# Altium PCB PCB1.PcbDoc
Units mil, origin at the board's own origin, x right, y up, seen from the top; angles counter-clockwise.
Board outline 1500 x 1100 mil, 2 copper layers (Top Layer, Bottom Layer), stack 65.792 mil thick; 7 components, 0 nets, 12 pads, 0 vias.
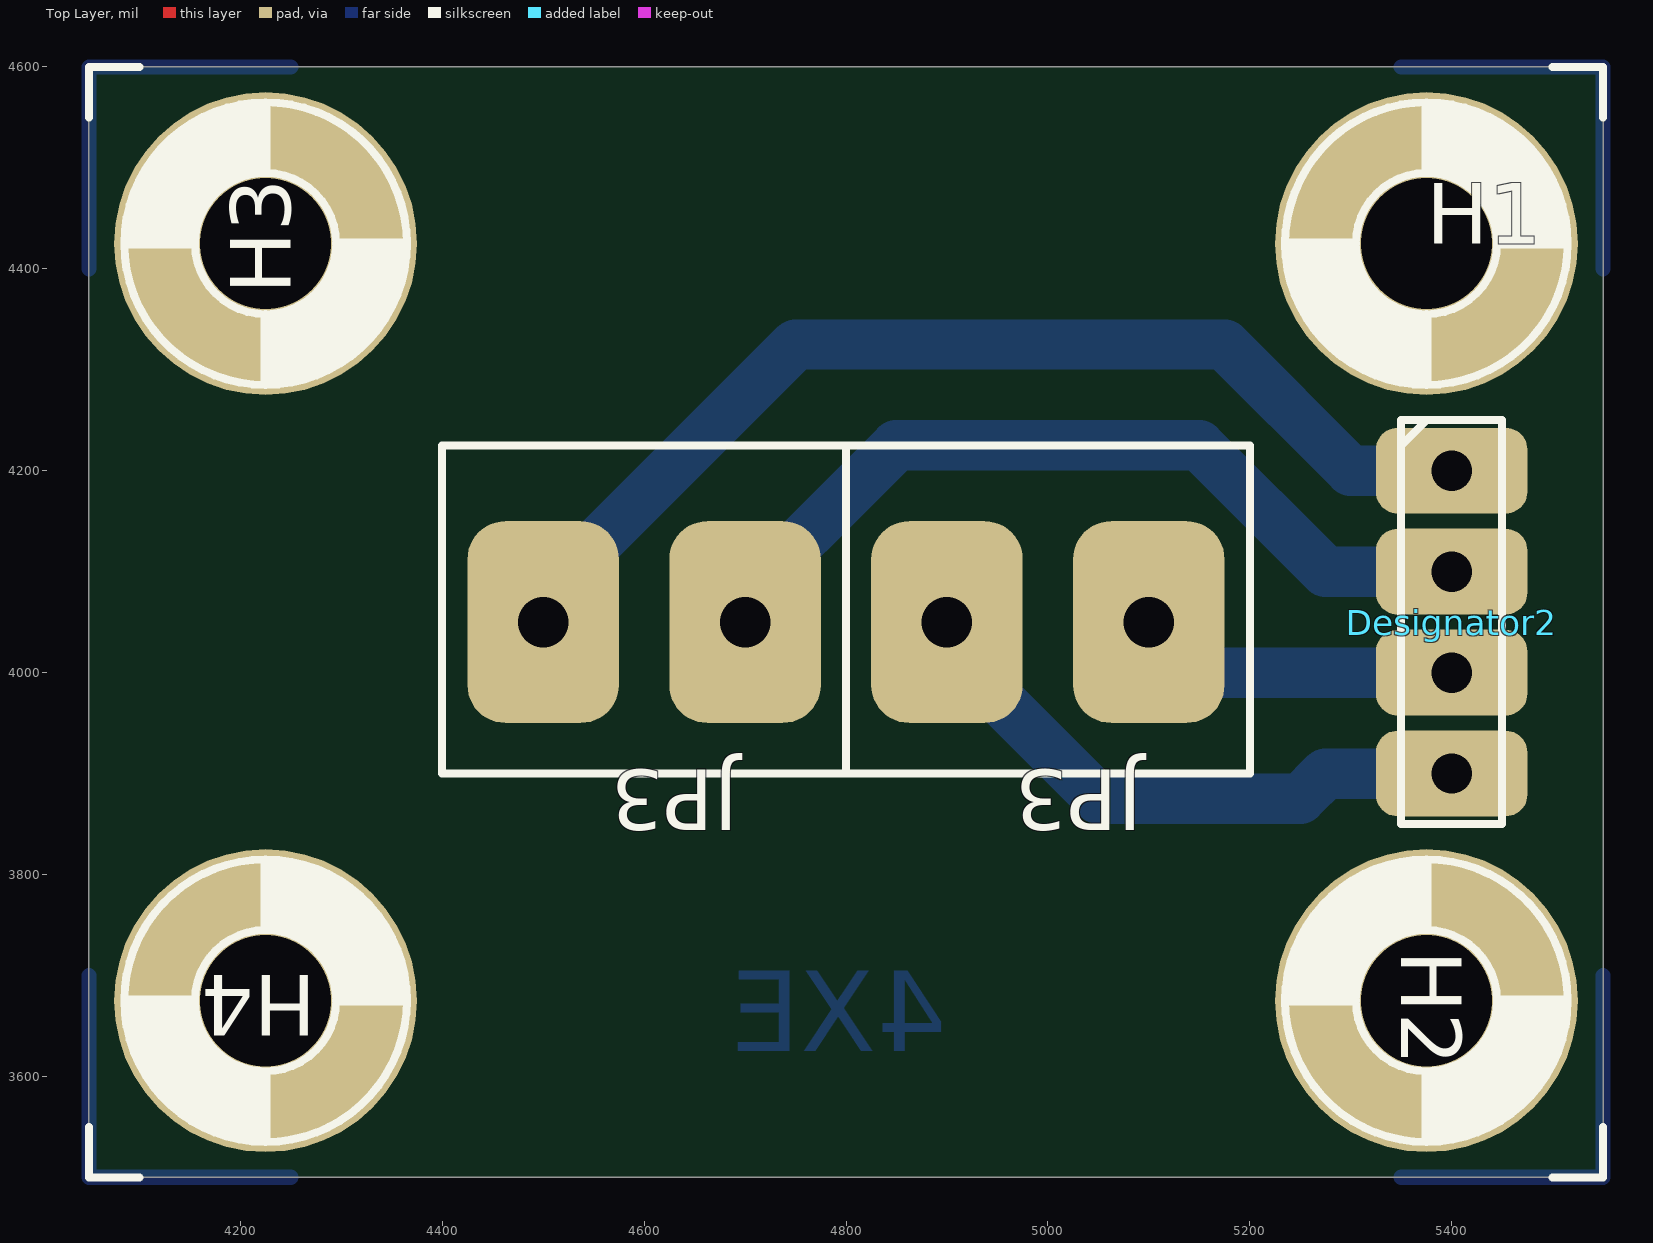
[diagram p0: Top Layer view]
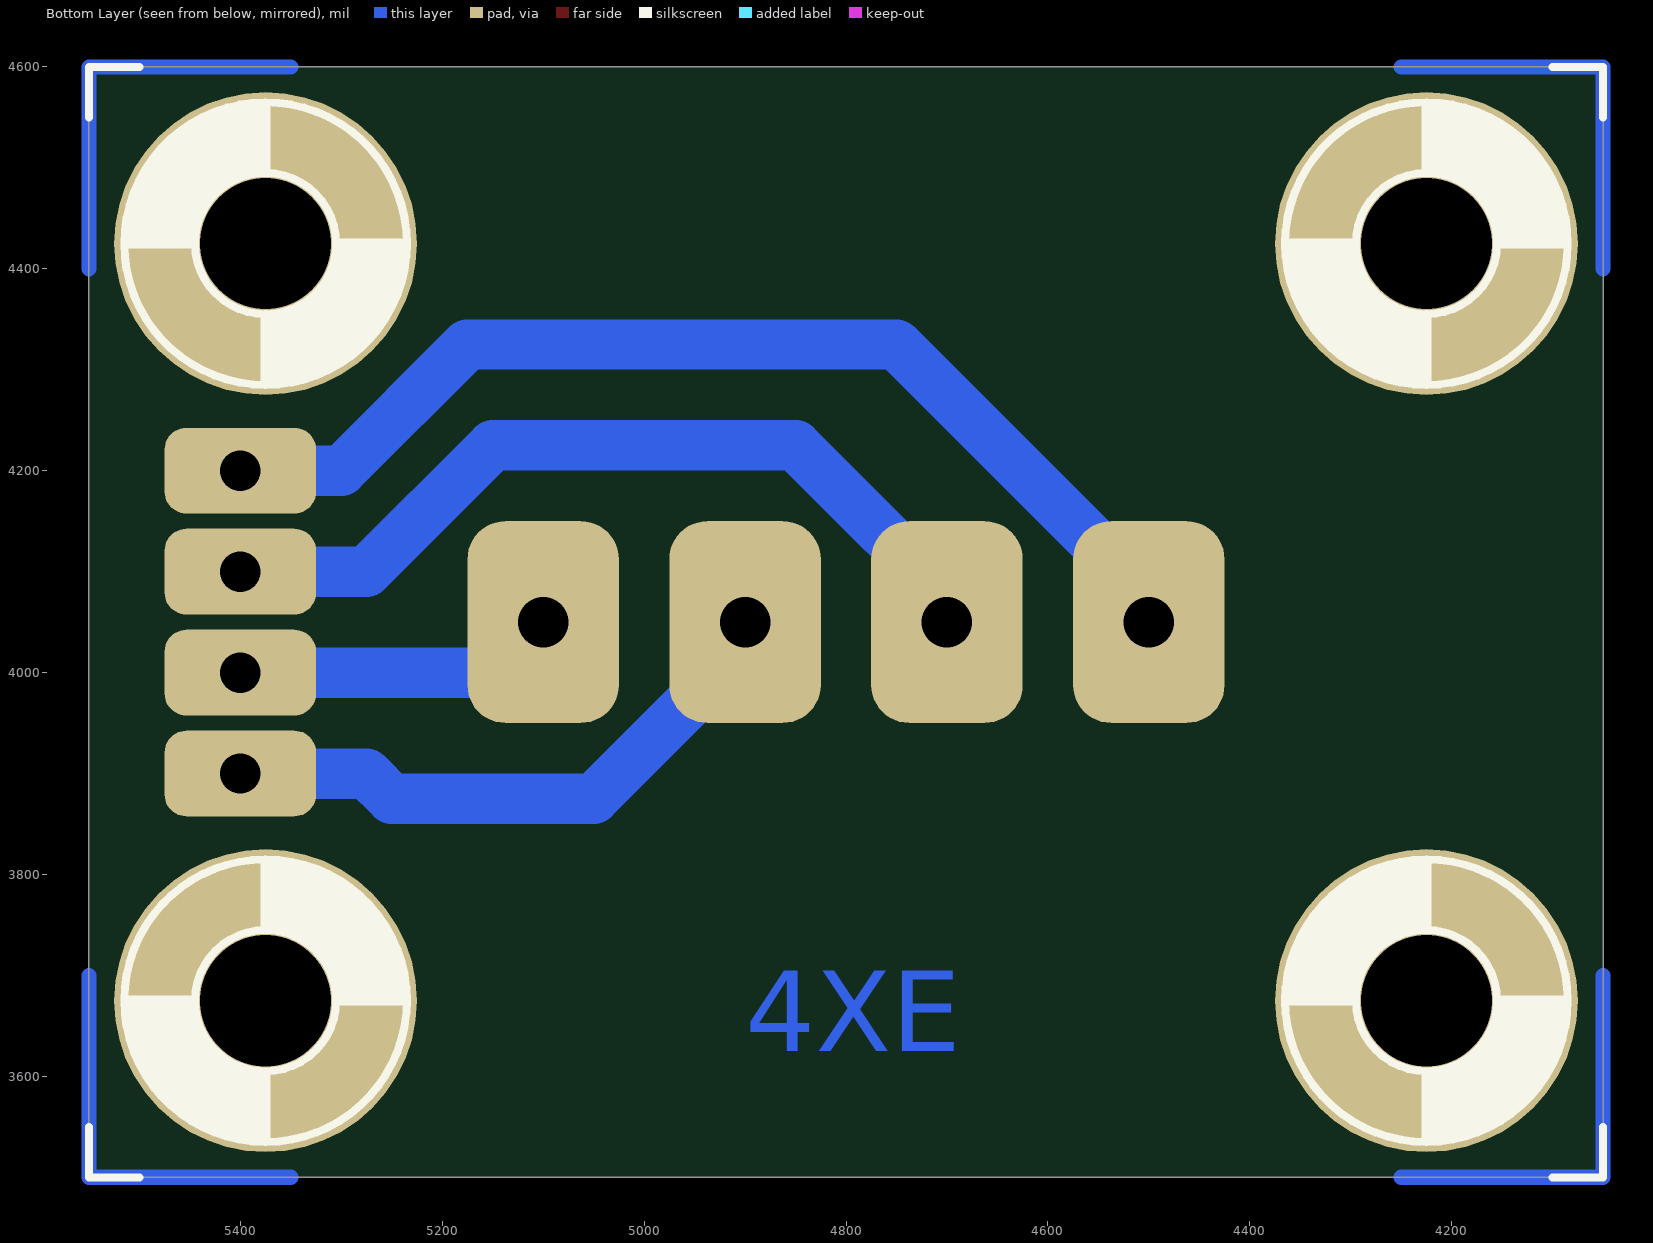
[diagram p1: Bottom Layer view, seen from below]

## Layer stack, top to bottom
Top Layer: signal copper 1.4
Dielectric: core 62.9921, FR-4, Dk 4.8
Bottom Layer: signal copper 1.4

## Board outline
5550,4600 4050,4600 4050,3500 5550,3500

## Design rules (kind name [scope] priority, off if disabled: settings)
Clearance [All] p1: gap=20
PolygonConnect [All] p1: connectstyle=Relief reliefconductorwidth=25 reliefentries=4 polygonreliefangle="90 Angle"
RoutingVias [All] p1: holewidth=28 width=50 viastyle="Through Hole" minholewidth=28 minwidth=50 maxholewidth=28 maxwidth=50
SilkscreenOverComponentPads [All] p1: minsilkscreentomaskgap=10
SolderMaskExpansion [All] p1: expansion=4
Width [All] p1: maxlimit=1000 minlimit=10 preferedwidth=20
27 further rules are at their usual default settings.

## Classes and differential pairs
component class "PCB OPTO FAST": H1 H2 H3 H4 JP3

## Components (designator, comment, footprint, x,y, rotation, side; value= is the part's Value field where it differs from the comment)
Designator2 "Comment" HDR4x1 5400,4200 r270 top
H1 "Agujero de Montaje" agujero 5375,4425 r0 top
H2 "Agujero de Montaje" agujero 5375,3675 r270 top
H3 "Agujero de Montaje" agujero 4225,4425 r90 top
H4 "Agujero de Montaje" agujero 4225,3675 r180 top
JP3 "Header2x1" BORNERA2_ENCH 4600,4050 r180 top
JP3 "Header2x1" BORNERA2_ENCH 5000,4050 r180 top

## Footprints (in the part's own frame and the unit in brackets; to place one, negate y for a bottom-side part, rotate by r counter-clockwise, add the part's x,y. Pads: shape width x height; smd on the part's side, far side on the other; paste and mask are expansions set on the pad)
agujero [mil] "AGUJERO DE MONTAJE"
  round 300 hole 130: 1(0,0)
  silkscreen extent -140,-140 175,175
BORNERA2_ENCH [mil]
  rrect50% 150x200 hole 50: 1(-100,0) 2(100,0)
  silkscreen extent -200,-175 200,150, body extent -197,-178 197,153, height 472
HDR4x1 [mil] "HEADER 4x1"
  rrect50% 85x150 hole 40: 1(0,0) 2(100,0) 3(200,0) 4(300,0)
  silkscreen extent -50,-50 350,50

## Part data
JP3 JP3: "Header 2x1"

## Nets (pads, with @x,y where several pads share a name; then routed paths per layer and width w, separated by ;. In a path a pad name is that pad's centre, name@x,y a point inside that pad or via, vN(x,y) a via of type N, cw(c..) or ccw(c..) an arc to the next point about the centre after c; other vN are vias at no path point)
pads on no net: Designator2.1 Designator2.2 Designator2.3 Designator2.4 H1.1 H2.1 H3.1 H4.1 JP3.1 JP3.2
copper on no net: | length 4695.3
  Bottom Layer w15: 4050,3700 4050,3500 4250,3500 ; 4050,4400 4050,4600 4250,4600 ; 5350,3500 5550,3500 5550,3700 ; 5350,4600 5550,4600 5550,4400
  Bottom Layer w30: 5300,4100 5400,4100
  Bottom Layer w50: 4475,4050 4750,4325 5175,4325 5300,4200 5400,4200 ; 4875,4050 5050,3875 5250,3875 5275,3900 5350,3900 ; 5100,4000 5350,4000 ; 5400,4100 5275,4100 5150,4225 4850,4225 ; 4850,4225 4675,4050 4850,4225

## Other copper
Bottom Layer:
  text "4XE" at 4900,3625 h80